# Altium PCB SD卡卡座2.PcbDoc
Units mm, origin at the board's own origin, x right, y up, seen from the top; angles counter-clockwise.
Board outline 750.32 x 442.21 mm, 2 copper layers (Top Layer, Bottom Layer); 9 components, 0 nets, 132 pads, 16 vias.
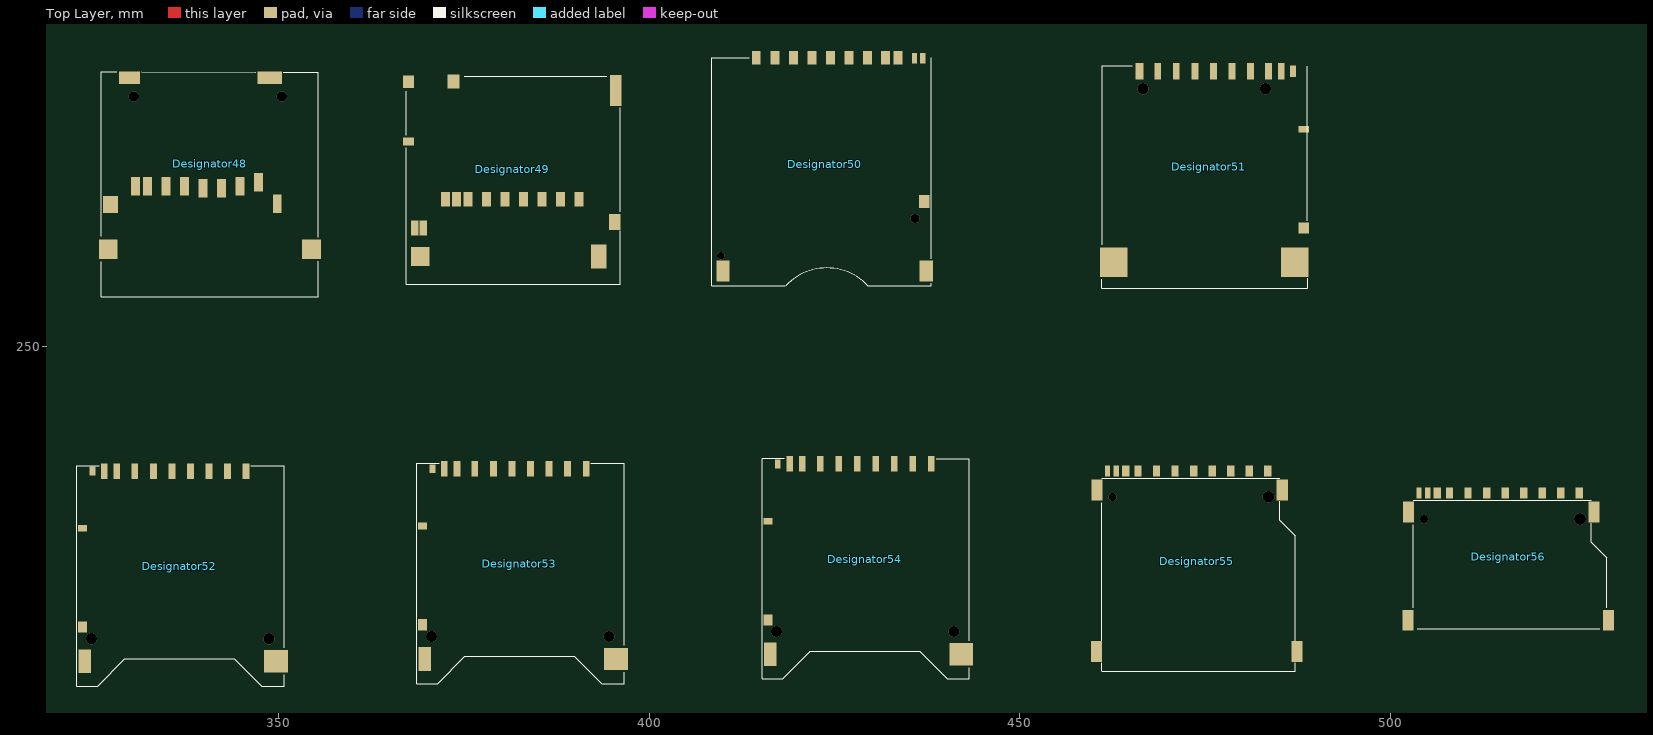
[diagram p0: Top Layer view]
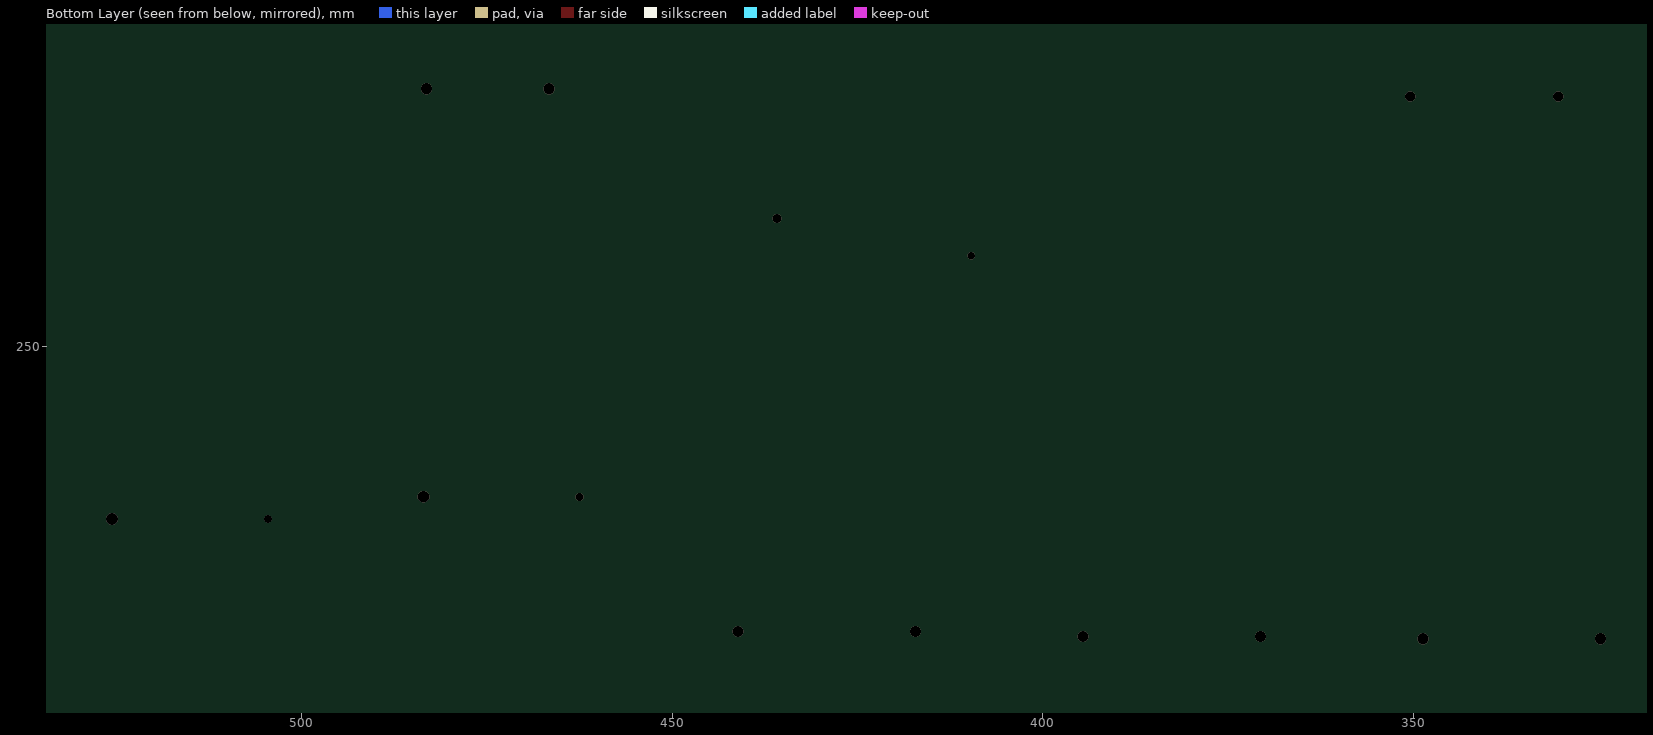
[diagram p1: Bottom Layer view, seen from below]

## Layer stack, top to bottom
Top Solder: solder mask 0.0102, Solder Resist, Dk 3.5
Top Layer: signal copper 0.0356
Dielectric 1: dielectric 0.32, FR-4, Dk 4.8
Bottom Layer: signal copper 0.0356
Bottom Solder: solder mask 0.0102, Solder Resist, Dk 3.5

## Board outline
0,0 750.316,0 750.316,442.214 0,442.214

## Design rules (kind name [scope] priority, off if disabled: settings)
Clearance [All] p1: gap=0.254 ignorepadtopadclearanceinfootprint=FALSE except(0: Arc-Hole Track-Hole SMDPad-Hole THPad-Hole Via-Hole Fill-Hole Poly-Hole Region-Hole Text-Hole)
PolygonConnect [All] p1: connectstyle=Relief reliefconductorwidth=0.254 reliefentries=4 polygonreliefangle="90 Angle" airgapwidth=0.254
RoutingVias [All] p1: holewidth=0.711 width=1.27 viastyle="Through Hole" minholewidth=0.711 minwidth=1.27 maxholewidth=0.711 maxwidth=1.27
SolderMaskExpansion [All] p1: expansion=0.102 istentingtop=FALSE
Width [All] p1: maxlimit=0.254 minlimit=0.254 preferedwidth=0.254
30 further rules are at their usual default settings.

## Components (designator, comment, footprint, x,y, rotation, side; value= is the part's Value field where it differs from the comment)
Designator48 "Comment" ML-5009980900 340.741,274.701 r180 top
Designator49 "Comment" ML-5035000993 390.539,269.875 r180 top
Designator50 "Comment" TE-1-1775059-1 423.528,274.59 r0 top
Designator51 "Comment" TE-1903302-3 475.493,274.27 r0 top
Designator52 "Comment" TE-1939115-1 336.599,220.38 r0 top
Designator53 "Comment" TE-1939870-1 382.469,220.701 r0 top
Designator54 "Comment" TE-2013357-1 429.051,221.343 r0 top
Designator55 "Comment" wl-693063010911 473.885,221.048 r0 top
Designator56 "Comment" wl-693063020911 515.911,221.663 r0 top

## Footprints (in the part's own frame and the unit in brackets; to place one, negate y for a bottom-side part, rotate by r counter-clockwise, add the part's x,y. Pads: shape width x height; smd on the part's side, far side on the other; paste and mask are expansions set on the pad)
ML-5009980900 [mm] "关注智芯Player公众号获取更多知识"
  rect 1.2x2.5 smd: 1(-6.575,2.55) 2(-4.075,3.05) 3(-1.575,3.35) 4(0.925,3.35) 5(3.425,3.05) 6(5.925,3.05) 7(8.425,3.05) 8(10.05,3.05) 9(-9.075,5.45)
  rect 3.3x1.7 smd: 10(-8.05,-11.55)
  rect 2.5x2.6 smd: 11(13.7,11.55) 12(-13.7,11.55)
  rect 2.8x1.7 smd: 13(10.85,-11.55)
  rect 2x2.3 smd: 14(13.425,5.55)
  silkscreen extent -14.63,-12.37 14.65,17.95, body extent -14.45,-12.22 14.45,17.83, height 3.15
ML-5035000993 [mm] "关注智芯Player公众号获取更多知识"
  rect 1.2x1.95 smd: 1(2.5,0) 2(5,0) 3(7.5,0) 4(10,0) 5(12.5,0) 6(15,0) 7(16.525,0) 8(18.025,0) 9(0,0)
  rect 1.55x4.17 smd: 10(-4.925,-14.7)
  rect 2.5x2.6 smd: 11(21.42,7.725)
  rect 2.1x3.2 smd: 12(-2.655,7.725)
  rect 1.6x1.87 smd: 13(16.95,-15.875)
  rect 1.5x1.65 smd: 14(23.025,-15.875)
  rect 1x2 smd: 15(22.15,3.85) 16(21.025,3.85)
  rect 1.5x1.1 smd: 17(23.025,-7.8)
  rect 1.55x2.2 smd: 18(-4.825,3.05)
  silkscreen extent -5.53,-16.61 23.35,11.46, body extent -5.35,-16.43 23.25,11.38, height 3
TE-1-1775059-1 [mm] "关注智芯Player公众号获取更多知识"
  rect 1.2x1.8 smd: 1(-6.585,14.4) 2(-4.085,14.4) 3(-1.585,14.4) 4(0.915,14.4) 5(3.415,14.4) 6(5.915,14.4) 7(8.34,14.4) 8(10.04,14.4) 9(-9.085,14.4)
  rect 0.7x1.4 smd: 10(12.27,14.3) 11(13.37,14.3)
  rect 1.8x2.8 smd: 12(-13.58,-14.4) 13(13.86,-14.4)
  rect 1.45x1.8 smd: 14(13.59,-5)
  silkscreen extent -15.11,-16.34 14.52,14.41, body extent -14.96,-16.22 14.35,14.37, height 2.83
TE-1903302-3 [mm] "关注智芯Player公众号获取更多知识"
  rect 0.9x2.25 smd: 1(-6.872,12.878) 2(-4.372,12.878) 3(-1.872,12.878) 4(0.628,12.878) 5(3.128,12.878) 6(5.628,12.878) 7(8.053,12.878) 8(9.753,12.878)
  rect 1.1x2.25 smd: 9(-9.372,12.878)
  rect 0.8x1.5 smd: 10(11.353,12.878)
  rect 3.7x4 smd: 11(-12.817,-12.877) 12(11.583,-12.877)
  rect 1.43x1.5 smd: 13(12.818,-8.257)
  rect 1.43x0.9 smd: 14(12.818,5.053)
  silkscreen extent -14.47,-16.38 13.3,13.65, body extent -14.39,-16.33 13.16,13.57, height 3.92
TE-1939115-1 [mm] "关注智芯Player公众号获取更多知识"
  rect 0.9x2.1 smd: 1(6.515,12.831) 2(4.015,12.831) 3(1.515,12.831) 4(-0.985,12.831) 5(-3.485,12.831) 6(-5.985,12.831) 7(-8.41,12.831) 8(-10.11,12.831) 9(9.015,12.831)
  rect 0.8x1.2 smd: 10(-11.71,12.831)
  rect 1.2x0.9 smd: 11(-13.04,5.099)
  rect 1.2x1.5 smd: 12(-13.04,-8.211)
  rect 1.7x3.2 smd: 13(-12.74,-12.831)
  rect 3.2x3 smd: 14(13.04,-12.831)
  silkscreen extent -13.8,-16.16 14.15,13.57, body extent -13.67,-16.24 14.01,13.46, height 2.74
TE-1939870-1 [mm] "关注智芯Player公众号获取更多知识"
  rect 0.9x2.1 smd: 1(6.515,12.831) 2(4.015,12.831) 3(1.515,12.831) 4(-0.985,12.831) 5(-3.485,12.831) 6(-5.985,12.831) 7(-8.41,12.831) 8(-10.11,12.831) 9(9.015,12.831)
  rect 0.8x1.2 smd: 10(-11.71,12.831)
  rect 1.2x0.9 smd: 11(-13.04,5.099)
  rect 1.2x1.5 smd: 12(-13.04,-8.211)
  rect 1.7x3.2 smd: 13(-12.74,-12.831)
  rect 3.2x3 smd: 14(13.04,-12.831)
  silkscreen extent -13.8,-16.16 14.15,13.57, body extent -13.67,-16.24 14.01,13.46, height 3.73
TE-2013357-1 [mm] "关注智芯Player公众号获取更多知识"
  rect 0.9x2.1 smd: 1(6.515,12.831) 2(4.015,12.831) 3(1.515,12.831) 4(-0.985,12.831) 5(-3.485,12.831) 6(-5.985,12.831) 7(-8.41,12.831) 8(-10.11,12.831) 9(9.015,12.831)
  rect 0.8x1.2 smd: 10(-11.71,12.831)
  rect 1.2x0.9 smd: 11(-13.04,5.099)
  rect 1.2x1.5 smd: 12(-13.04,-8.211)
  rect 1.7x3.2 smd: 13(-12.74,-12.831)
  rect 3.2x3 smd: 14(13.04,-12.831)
  silkscreen extent -13.8,-16.16 14.15,13.57, body extent -13.67,-16.24 14.01,13.46, height 2.74
wl-693063010911 [mm] "关注智芯Player公众号获取更多知识"
  rect 1x1.5 smd: 1(7.051,12.163) 2(4.551,12.163) 3(2.051,12.163) 4(-0.449,12.163) 5(-2.949,12.163) 6(-5.449,12.163) 7(-7.949,12.163) 8(-9.579,12.163) 9(9.551,12.163)
  rect 0.7x1.5 smd: 10(-10.879,12.163) 11(-12.079,12.163)
  rect 1.5x2.8 smd: 12(-13.499,9.623) 13(-13.524,-12.163) 14(13.524,-12.163) 15(11.52,9.623)
  silkscreen extent -12.83,-14.81 13.28,11.18, body extent -13.83,-14.81 14.17,11.99, height 3.42
wl-693063020911 [mm] "关注智芯Player公众号获取更多知识"
  rect 1x1.5 smd: 1(7.051,8.57) 2(4.551,8.57) 3(2.051,8.57) 4(-0.449,8.57) 5(-2.949,8.57) 6(-5.449,8.57) 7(-7.949,8.57) 8(-9.579,8.57) 9(9.551,8.57)
  rect 0.7x1.5 smd: 10(-10.879,8.57) 11(-12.079,8.57)
  rect 1.5x2.8 smd: 12(-13.499,6.03) 13(-13.524,-8.57) 14(13.524,-8.57) 15(11.52,6.03)
  silkscreen extent -12.85,-9.69 13.28,7.59, body extent -13.69,-9.5 13.96,8.5, height 3.42

## Via types
v1: diameter 1.5, hole 1.5, Top Layer to Bottom Layer, 8 vias
v2: diameter 1.6, hole 1.6, Top Layer to Bottom Layer, 2 vias
v3: diameter 1.1, hole 1.1, Top Layer to Bottom Layer, 2 vias
v4: diameter 1.4, hole 1.4, Top Layer to Bottom Layer, 2 vias
v5: diameter 1, hole 1, Top Layer to Bottom Layer, 1 vias
v6: diameter 1.2, hole 1.2, Top Layer to Bottom Layer, 1 vias

## Nets (pads, with @x,y where several pads share a name; then routed paths per layer and width w, separated by ;. In a path a pad name is that pad's centre, name@x,y a point inside that pad or via, vN(x,y) a via of type N, cw(c..) or ccw(c..) an arc to the next point about the centre after c; other vN are vias at no path point)
pads on no net: Designator48.1 Designator48.2 Designator48.3 Designator48.4 Designator48.5 Designator48.6 Designator48.7 Designator48.8 Designator48.9 Designator48.10 Designator48.11 Designator48.12 Designator48.13 Designator48.14 Designator49.1 Designator49.2 Designator49.3 Designator49.4 Designator49.5 Designator49.6 Designator49.7 Designator49.8 Designator49.9 Designator49.10 Designator49.11 Designator49.12 Designator49.13 Designator49.14 Designator49.15 Designator49.16 Designator49.17 Designator49.18 Designator50.1 Designator50.2 Designator50.3 Designator50.4 Designator50.5 Designator50.6 Designator50.7 Designator50.8 Designator50.9 Designator50.10 Designator50.11 Designator50.12 Designator50.13 Designator50.14 Designator51.1 Designator51.2 Designator51.3 Designator51.4 Designator51.5 Designator51.6 Designator51.7 Designator51.8 Designator51.9 Designator51.10 Designator51.11 Designator51.12 Designator51.13 Designator51.14 Designator52.1 Designator52.2 Designator52.3 Designator52.4 Designator52.5 Designator52.6 Designator52.7 Designator52.8 Designator52.9 Designator52.10 Designator52.11 Designator52.12 Designator52.13 Designator52.14 Designator53.1 Designator53.2 Designator53.3 Designator53.4 Designator53.5 Designator53.6 Designator53.7 Designator53.8 Designator53.9 Designator53.10 Designator53.11 Designator53.12 Designator53.13 Designator53.14 Designator54.1 Designator54.2 Designator54.3 Designator54.4 Designator54.5 Designator54.6 Designator54.7 Designator54.8 Designator54.9 Designator54.10 Designator54.11 Designator54.12 Designator54.13 Designator54.14 Designator55.1 Designator55.2 Designator55.3 Designator55.4 Designator55.5 Designator55.6 Designator55.7 Designator55.8 Designator55.9 Designator55.10 Designator55.11 Designator55.12 Designator55.13 Designator55.14 Designator55.15 Designator56.1 Designator56.2 Designator56.3 Designator56.4 Designator56.5 Designator56.6 Designator56.7 Designator56.8 Designator56.9 Designator56.10 Designator56.11 Designator56.12 Designator56.13 Designator56.14 Designator56.15
copper on no net:
  other v1: 324.743,210.599 348.683,210.599 370.614,210.92 394.554,210.92 417.196,211.562 441.136,211.562 466.591,284.792 483.161,284.792
  other v2: 525.556,226.768 483.531,229.746
  other v3: 504.537,226.758 462.511,229.736
  other v4: 330.441,283.751 350.441,283.751
  other v5: 409.668,262.29
  other v6: 435.868,267.29